# Altium PCB Board_Small_Unit_Altium.pcbdoc
Units mm, origin at the board's own origin, x right, y up, seen from the top; angles counter-clockwise.
Board outline 72.19 x 66.88 mm, 2 copper layers (Top Layer, Bottom Layer); 30 components, 28 nets, 89 pads, 12 vias.
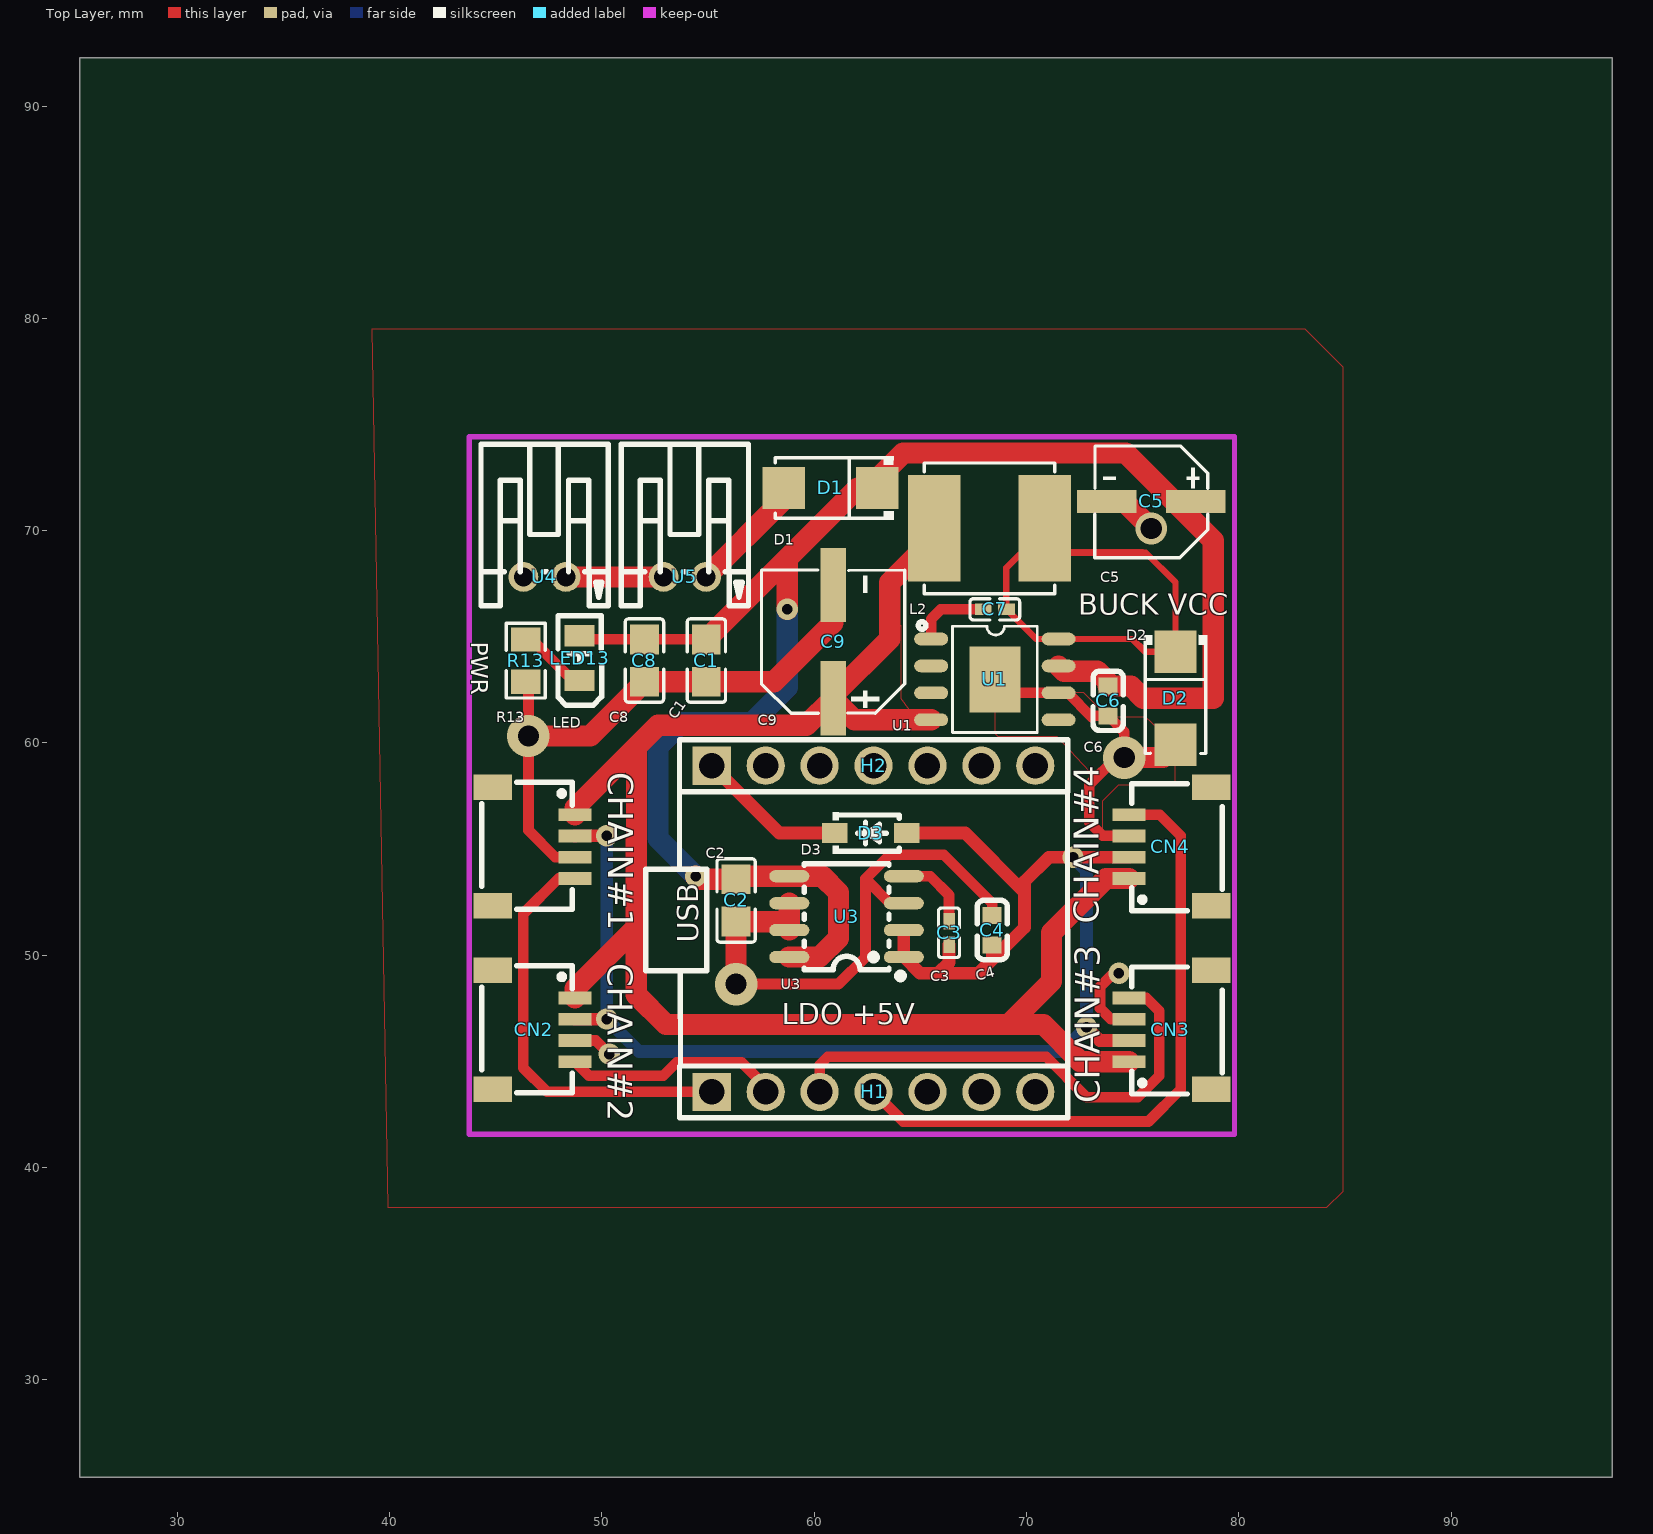
[diagram p0: Top Layer view]
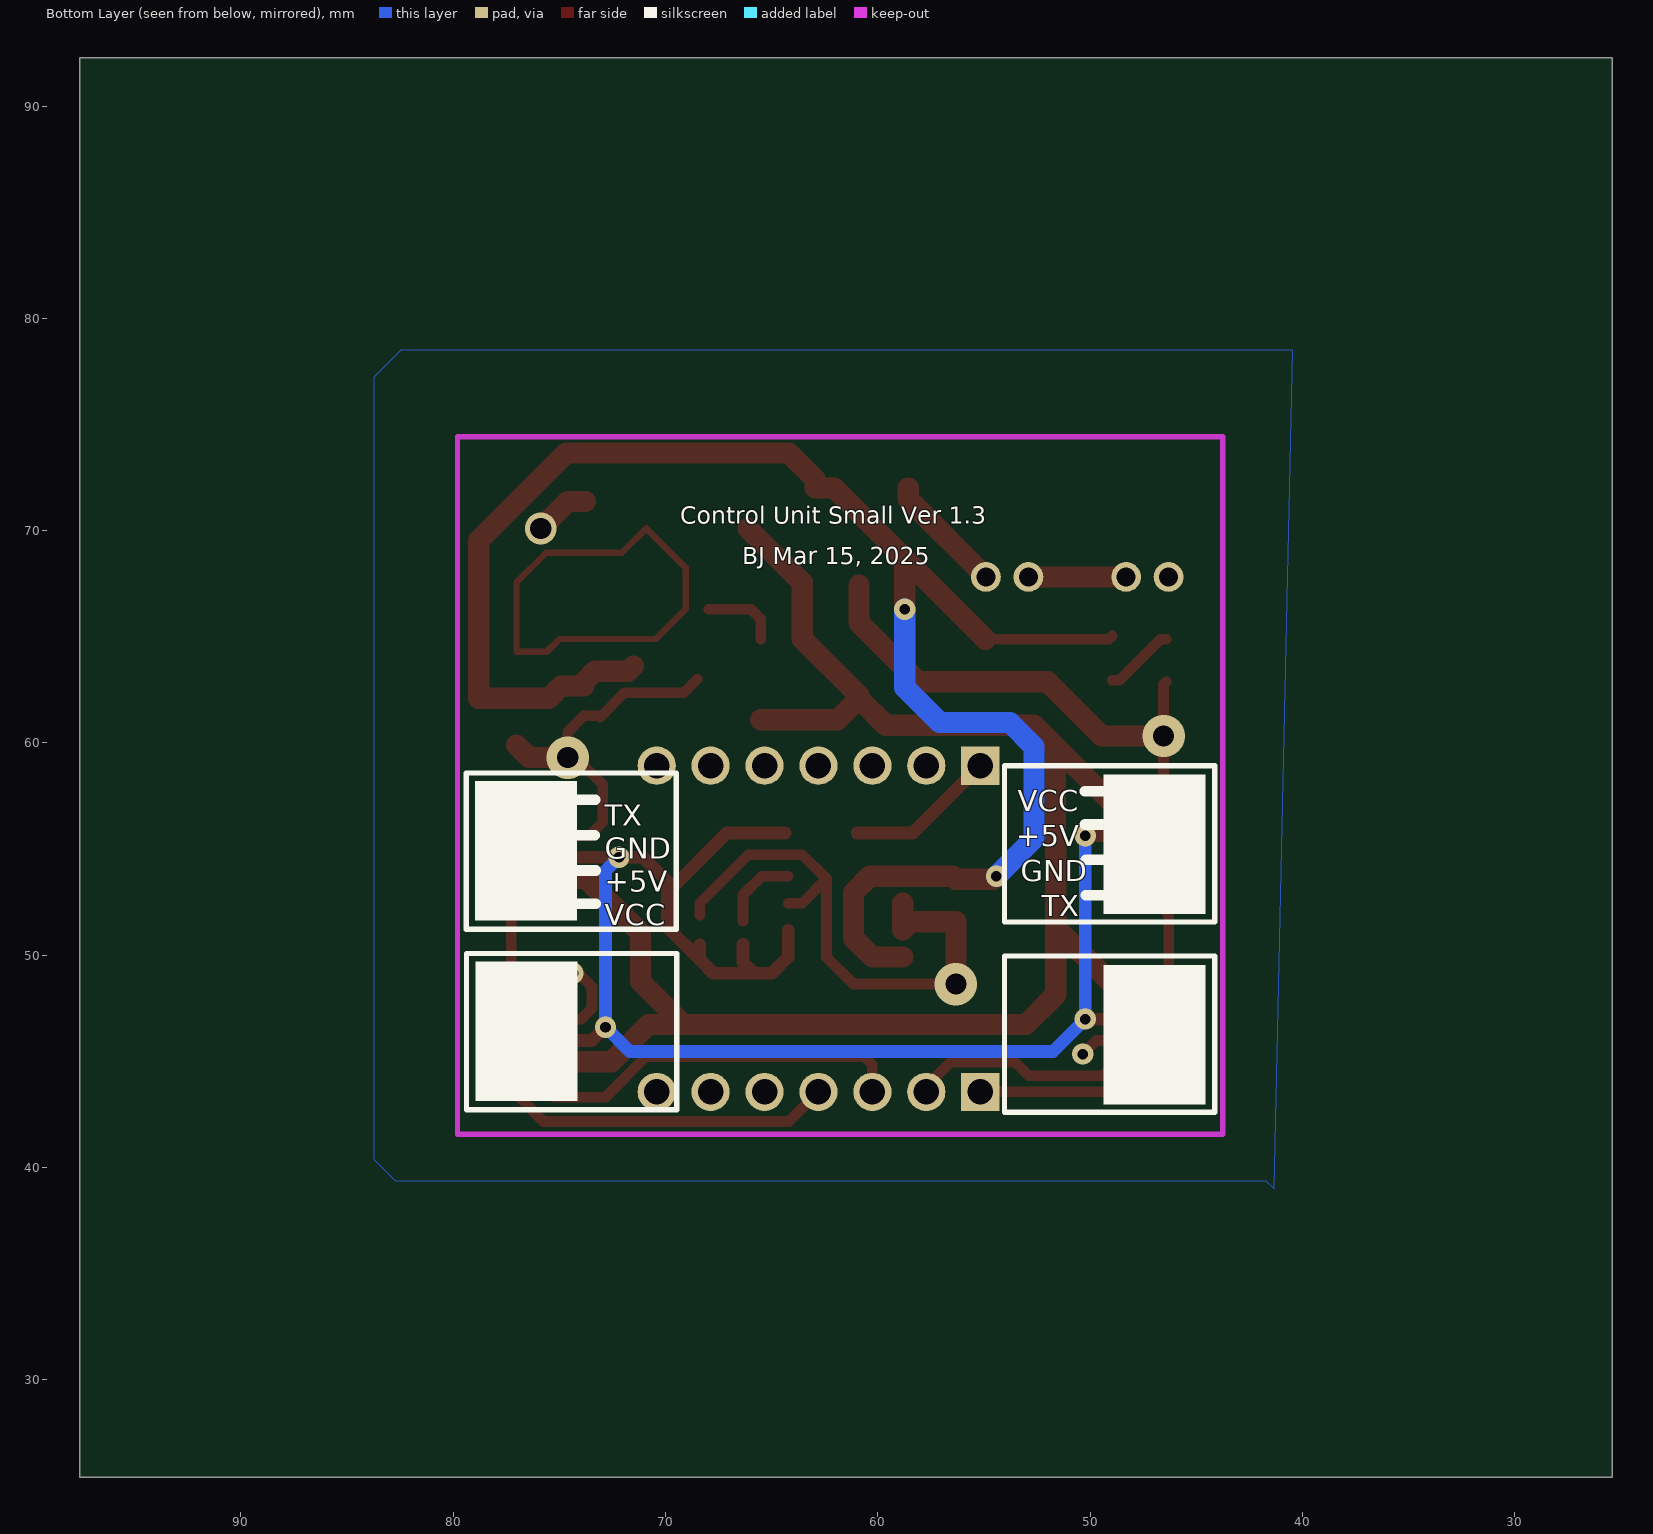
[diagram p1: Bottom Layer view, seen from below]

## Layer stack, top to bottom
Top Layer: signal copper (thickness not stored)
Dielectric: dielectric 0.32, FR-4, Dk 4.8
Bottom Layer: signal copper (thickness not stored)

## Board outline
97.591,25.4 25.4,25.4 25.4,92.276 97.591,92.276

## Components (designator, comment, footprint, x,y, rotation, side; value= is the part's Value field where it differs from the comment)
C1 "1uF" C0805 54.919,63.881 r90 top
C2 "1uF" C0805 56.316,52.578 r90 top
C3 "10nF" C0402 66.349,51.054 r270 top
C4 "10uF" C0603 68.381,51.181 r270 top
C5 "22uF" CAP-SMD_BD5.0-L5.3-W5.3-FD 75.874,71.374 r180 top
C6 "2.2uF" C0603 73.842,61.976 r270 top
C7 "10nF" C0402 68.508,66.294 r180 top
C8 "22uF" C0805 52.001,63.881 r90 top
C9 "120uF" CAP-SMD_BD6.3-L6.6-W6.6-FD 60.888,64.77 r90 top
CHAIN#1 "SM04B-SRSS-TB (LF)(SN)" CONN-SMD_4P-P1.00_SM04B-SRSS-TB-LF-SN 46.791,55.118 r270 top
CN2 "SM04B-SRSS-TB (LF)(SN)" CONN-SMD_4P-P1.00_SM04B-SRSS-TB-LF-SN 46.791,46.482 r270 top
CN3 "SM04B-SRSS-TB (LF)(SN)" CONN-SMD_4P-P1.00_SM04B-SRSS-TB-LF-SN 76.763,46.482 r90 top
CN4 "SM04B-SRSS-TB (LF)(SN)" CONN-SMD_4P-P1.00_SM04B-SRSS-TB-LF-SN 76.763,55.118 r90 top
D1 "SS34_C8678" SMA_L4.3-W2.6-LS5.2-RD 60.761,72.009 r180 top
D2 "SS34_C8678" SMA_L4.3-W2.6-LS5.2-RD 77.017,62.103 r270 top
D3 "B5819W_C8598" SOD-123_L2.7-W1.6-LS3.7-RD-1 62.666,55.753 r0 top
H1 "A2541HWV-7P" HDR-TH_7P-P2.54-V_A2541HWV-7P 62.793,43.561 r0 top
H2 "A2541HWV-7P" HDR-TH_7P-P2.54-V_A2541HWV-7P 62.793,58.928 r0 top
L2 "22uH" IND-SMD_L6.0-W6.0_SWPA6045S 68.254,70.104 r180 top
LED13 "SZYY0805YG" LED0805-R-RD_GREEN 48.945,63.997 r90 top
R13 "10kΩ" R0805 46.41,63.881 r90 top
U1 "LM22675MRX-5.0/NOPB" SO-8_L4.9-W3.9-P1.27-LS6.0-BL-EP5.1 68.508,62.992 r270 top
U3 "LT1763CS8-5#TRPBF" SO-8_L4.9-W3.9-P1.27-LS5.9-BL 61.523,51.816 r90 top
U4 "S2B-PH-K-S-GW" CONN-TH_S2B-PH-K-S-GW 47.299,67.818 r0 top
U5 "S2B-PH-K-S-GW" CONN-TH_S2B-PH-K-S-GW 53.903,67.818 r0 top
? "" ? 61.743,76.91 r0 top
? "" ? 40.949,58.039 r0 top
? "" ? 62.109,56.591 r0 top
? "" ? 50.859,51.071 r0 top
? "" ? 54.033,51.176 r0 top

## Footprints (in the part's own frame and the unit in brackets; to place one, negate y for a bottom-side part, rotate by r counter-clockwise, add the part's x,y. Pads: shape width x height; smd on the part's side, far side on the other; paste and mask are expansions set on the pad)
C0402 [mm]
  rect 0.79x0.54 smd paste-100 mask+0.051: 1(-0.545,0) 2(0.545,0)
  silkscreen extent -1.17,-0.5 1.17,0.5
C0603 [mm]
  rect 0.8x0.9 smd paste+0 mask+0.051: 1(-0.7,0) 2(0.7,0)
  silkscreen extent -1.41,-0.71 1.39,0.72
C0805 [mm]
  rect 1.41x1.35 smd paste-100 mask+0.051: 1(-1,0) 2(1,0)
  silkscreen extent -1.96,-0.9 1.96,0.9
CAP-SMD_BD5.0-L5.3-W5.3-FD [mm]
  rect 2.8x1.1 smd paste+0 mask+0.051: 1(-2.1,0) 2(2.1,0)
  silkscreen extent -2.66,-2.62 2.66,2.65
CAP-SMD_BD6.3-L6.6-W6.6-FD [mm]
  rect 3.5x1.2 smd paste+0 mask+0.051: 1(-2.67,0) 2(2.67,0)
  silkscreen extent -3.38,-3.38 3.38,3.38
CONN-SMD_4P-P1.00_SM04B-SRSS-TB-LF-SN [mm]
  rect 0.6x1.55 smd paste+0 mask+0.051: 1(-1.5,1.938) 2(-0.5,1.938) 3(0.501,1.938) 4(1.5,1.938)
  rect 1.2x1.8 smd paste+0 mask+0.051: 5(2.8,-1.938) 6(-2.8,-1.938)
  silkscreen extent -3.02,-2.46 2.96,1.8
CONN-TH_S2B-PH-K-S-GW [mm]
  round 1.4 hole 0.9 paste+0 mask+0.051: 1(1,0) 2(-1,0)
  silkscreen extent -3,-1.35 3,6.25
HDR-TH_7P-P2.54-V_A2541HWV-7P [mm]
  rect 1.8x1.8 hole 1.2 paste+0 mask+0.051: 1(-7.62,0)
  round 1.8 hole 1.2 paste+0 mask+0.051: 2(-5.08,0) 3(-2.54,0) 4(0,0) 5(2.54,0) 6(5.08,0) 7(7.62,0)
  silkscreen extent -9.14,-1.22 9.14,1.22
IND-SMD_L6.0-W6.0_SWPA6045S [mm]
  rect 2.474x5.02 smd paste+0 mask+0.051: 1(-2.603,0) 2(2.603,0)
  silkscreen extent -3.08,-3.08 3.08,3.08
LED0805-R-RD_GREEN [mm]
  rect 1x1.4 smd paste+0 mask+0.051: 1(1.05,0) 2(-1.05,0)
  silkscreen extent -2.22,-1.04 1.99,1.01
R0805 [mm]
  rect 1.133x1.377 smd paste-100 mask+0.051: 1(-1,0) 2(1,0)
  silkscreen extent -1.76,-0.92 1.76,0.92
SMA_L4.3-W2.6-LS5.2-RD [mm]
  rect 2x2 smd paste+0 mask+0.051: 1(-2.2,0) 2(2.2,0)
  silkscreen extent -2.98,-1.5 2.6,1.5
SO-8_L4.9-W3.9-P1.27-LS5.9-BL [mm]
  oval 0.574x1.888 smd paste+0 mask+0.051: 1(-1.905,-2.699) 2(-0.635,-2.699) 3(0.635,-2.699) 4(1.905,-2.699) 5(1.905,2.699) 6(0.635,2.699) 7(-0.635,2.699) 8(-1.905,2.699)
  silkscreen extent -2.94,-2.69 2.5,2
SO-8_L4.9-W3.9-P1.27-LS6.0-BL-EP5.1 [mm]
  oval 0.6x1.6 smd paste+0 mask+0.051: 1(-1.905,-3) 2(-0.635,-3) 3(0.635,-3) 4(1.905,-3) 5(1.905,3) 6(0.635,3) 7(-0.635,3) 8(-1.905,3)
  rect 3.1x2.4 smd paste+0 mask+0.051: 9(0,0)
  silkscreen extent -2.71,-3.6 2.5,2
SOD-123_L2.7-W1.6-LS3.7-RD-1 [mm]
  rect 1.2x0.95 smd paste+0 mask+0.051: 1(-1.7,0) 2(1.7,0)
  silkscreen extent -1.81,-0.98 1.35,0.98
? [mm]

## Via types
v1: diameter 1, hole 0.5, Top Layer to Bottom Layer, tented both sides, 8 vias
v2: diameter 2, hole 1, Top Layer to Bottom Layer, tented both sides, 3 vias
v3: diameter 1.5, hole 1, Top Layer to Bottom Layer, tented both sides, 1 vias

## Nets (pads, with @x,y where several pads share a name; then routed paths per layer and width w, separated by ;. In a path a pad name is that pad's centre, name@x,y a point inside that pad or via, vN(x,y) a via of type N, cw(c..) or ccw(c..) an arc to the next point about the centre after c; other vN are vias at no path point)
+5V: C3.2 C4.2 CHAIN#1.2 CN2.2 CN3.2 CN4.2 D3.2 U3.1 U3.2 | length 70.5
  Top Layer w0.6: CN2.2 v1(50.22,46.99) ; CHAIN#1.2 v1(50.22,55.626) ; U3.2 U3.1 64.984,49.149 65.841,49.149 ; D3.2 67.111,55.753 69.905,52.959 ; C3.2 66.349,49.657 65.841,49.149 ; C4.2 68.381,49.784 ; v1(72.826,46.609) 73.453,45.982 CN3.2 ; CN4.2 74.817,54.61 v1(72.191,54.61) 71.048,54.61 69.905,53.467 69.905,52.959 ; 65.841,49.149 67.746,49.149 68.381,49.784 ; 68.381,49.784 69.905,51.308 69.905,52.959
  Bottom Layer w0.6: v1(50.22,55.626) v1(50.22,46.99) 51.744,45.466 71.683,45.466 v1(72.826,46.609) 72.826,53.975 v1(72.191,54.61)
+7.4V: D1.2 U5.1 | length 5.7
  Top Layer w1: U5.1 58.561,71.476 D1.2
BAT: C1.2 C2.2 C5.1 C6.1 C8.2 D1.1 LED13.1 U1.7 U3.5 U3.8 | length 83.2
  Top Layer w0.5: LED13.1@48.944,65.047 49.11,64.881 C8.2 C1.2
  Top Layer w1: v1(54.411,53.721) 54.554,53.578 C2.2 56.459,53.721 U3.5 60.38,53.721 61.142,52.959 61.142,50.8 60.253,49.911 U3.8 ; C1.2 57.832,67.794 62.047,72.009 D1.1 62.961,72.431 64.19,73.66 74.672,73.66 77.974,70.358 78.795,69.537 78.795,62.103 75.493,62.103 74.92,62.676 C6.1 73.842,62.865 73.334,63.373 71.762,63.373 U1.7 ; v1(58.729,66.294) 58.729,68.691 58.776,68.738
  Bottom Layer w1: v1(54.411,53.721) 52.633,55.499 52.633,56.134 52.633,59.817 53.776,60.96 57.078,60.96 58.729,62.611 v1(58.729,66.294)
ESP_A0: CHAIN#1.4 H1.1 | length 19.7
  Top Layer w0.5: CHAIN#1.4@48.729,53.617 47.957,53.617 46.283,51.943 46.283,44.704 47.426,43.561 H1.1
ESP_A1: CN2.4 H1.2 | length 10.2
  Top Layer w0.5: CN2.4 49.387,44.323 52.887,44.323 53.522,44.958 56.57,44.958 57.713,43.815 H1.2
ESP_A2: CN3.4 H1.3 | length 23.4
  Top Layer w0.5: H1.3 60.253,44.831 60.634,45.212 70.921,45.212 72.826,43.307 75.239,43.307 76.255,44.323 76.255,47.371 75.643,47.983 CN3.4
ESP_A3: CN4.4 H1.4 | length 30.5
  Top Layer w0.5: H1.4 64.19,42.164 75.747,42.164 77.271,43.688 77.271,55.626 76.279,56.618 CN4.4
ESP_MI: H2.5
ESP_MO: H2.4
ESP_POWER: D3.1 H2.1 | length 7.1
  Top Layer w0.6: H2.1 58.348,55.753 D3.1
ESP_RX: H2.7
ESP_SCK: H2.6
ESP_SCL: H1.6
ESP_SDA: H1.5
ESP_TX: H1.7
GND: C1.1 C2.1 C4.1 C5.2 C6.2 C8.1 C9.2 CHAIN#1.3 CN2.3 CN3.3 CN4.3 D2.2 H2.2 R13.1 U1.6 U1.9 U3.3 U3.6 U3.7 U4.2 | length 80.9
  Top Layer w0.5: R13.1 46.537,62.754 v2(46.537,60.325) 46.537,55.88 47.799,54.618 CHAIN#1.3 ; CN2.3 49.704,45.982 v1(50.347,45.339) ; v2(56.316,48.641) 61.142,48.641 62.412,49.911 62.412,53.594 ; U3.3 63.555,52.451 62.412,53.594 ; C4.1 68.381,52.451 66.095,54.737 63.555,54.737 62.412,53.594 ; U1.9 69.143,62.357 U1.6 71.937,62.357 73.08,61.214 73.142,61.276 C6.2 74.604,60.514 v2(74.604,59.309) 74.223,59.309 72.953,58.039 72.953,56.261 73.596,55.618 CN4.3 ; v1(74.35,49.149) 74.096,49.149 73.461,48.514 73.461,47.752 73.461,47.498 73.977,46.982 CN3.3
  Top Layer w1: v2(46.537,60.325) 49.445,60.325 C8.1 C1.1 58.11,62.881 60.888,65.659 C9.2 ; v2(56.316,48.641) C2.1 58.427,51.578 U3.7 U3.6 ; C5.2 74.604,71.374 v3(75.874,70.104) ; v2(74.604,59.309) 76.423,59.309 D2.2
R13_2: LED13.2 R13.2 | length 3.3
  Top Layer w0.5: R13.2 46.679,64.882 48.615,62.946 LED13.2
S$1051: 
S$3274: 
S$11580: 
S$11590: 
S$11816: 
S$11829: 
SW: C7.1 D2.1 L2.1 U1.8 | length 23.8
  Top Layer w0.3: C7.1 69.053,68.249 70.908,70.104 72.051,68.961 75.62,68.961 77.017,67.564 D2.1 75.579,64.303 74.985,64.897 U1.8 70.45,64.897 C7.1
U1_1: C7.2 U1.1 | length 3.6
  Top Layer w0.5: U1.1 65.508,65.834 65.968,66.294 C7.2
U3_4: C3.1 U3.4 | length 3.7
  Top Layer w0.5: U3.4 65.46,53.721 66.349,52.832 C3.1
U4_1: U4.1 U5.2 | length 4.6
  Top Layer w1: U4.1 U5.2
VCC: C9.1 CHAIN#1.1 CN2.1 CN3.1 CN4.1 L2.2 U1.4 | length 80.8
  Top Layer w1: CN2.1@48.729,47.983 48.729,48.42 51.617,51.308 ; CHAIN#1.1 48.729,56.929 52.633,60.833 59.621,60.833 C9.1 ; 51.63,59.83 51.617,51.308 ; U1.4 61.901,61.087 C9.1 ; L2.2@66.108,70.104 63.555,67.551 63.555,64.897 60.888,62.23 C9.1 ; 68.725,46.736 69.143,46.736 71.175,48.768 71.175,51.054 73.738,53.617 CN4.1@74.825,53.617 ; CN3.1@74.825,44.981 72.547,44.981 70.794,46.736 53.014,46.736 51.617,48.133 51.617,51.308
pads on no net: CHAIN#1.5 CHAIN#1.6 CN2.5 CN2.6 CN3.5 CN3.6 CN4.5 CN4.6 H2.3 U1.2 U1.3 U1.5

## Polygon pours and split planes (outlines as drawn)
GND on Bottom Layer (solid): 40.441,78.486 82.478,78.486 83.748,77.216 83.748,40.386 82.732,39.37 41.711,39.37 41.33,38.989
VCC on Top Layer (solid): 64.063,65.278 64.063,62.103 64.444,61.595 64.444,61.087 61.904,61.087 61.777,61.087 60.761,62.103 60.761,62.23 64.063,65.532
SW on Top Layer (solid): 69.016,68.199 69.016,66.294 70.413,64.897 74.985,64.897 75.62,64.262 77.017,64.262 77.017,67.564 75.62,68.961 75.493,69.088 69.905,69.088 69.016,68.199
GND on Top Layer (solid): 73.588,55.626 73.588,57.277 74.223,57.912 74.35,58.039 77.017,58.039 77.017,59.944 75.62,61.214 73.842,61.214 72.699,62.357 71.556,62.357 71.429,62.484 68.508,62.484 68.508,60.452 68.635,60.325 71.429,60.325 72.953,58.674 72.953,58.547 72.953,56.261
VCC on Top Layer (solid): 39.171,79.502 83.113,79.502 84.891,77.724 84.891,38.862 84.129,38.1 39.933,38.1

## Silkscreen, mask and mechanical layers (free items; w line width, h text height)
Top Overlay:
  lines w0.254: 52.059,49.266 54.937,49.266 54.937,54.042 52.059,54.042 52.059,49.266
  lines w0.254 net S$11816: 53.651,54.078 53.651,57.707 ; 53.685,49.149 53.7,44.806
  lines w0.254 net S$11829: 71.929,57.694 71.937,44.767
  text "D1" at 58.094,69.346 h0.5
  text "C5" at 73.461,67.568 h0.5
  text "BUCK VCC" at 72.445,66.048 h1
  text "D2" at 74.697,64.825 h0.5
  text "PWR" at 43.851,64.77 h0.8 r270
  text "C1" at 53.473,61.071 h0.5 r55
  text "R13" at 45.013,60.964 h0.5
  text "C8" at 50.335,60.965 h0.5
  text "C9" at 57.332,60.837 h0.5
  text "LED" at 47.68,60.71 h0.5
  text "U1" at 63.682,60.583 h0.5
  text "C6" at 72.699,59.567 h0.5
  text "D3" at 59.364,54.741 h0.5
  text "C2" at 54.885,54.563 h0.5
  text "CHAIN#4" at 73.798,51.484 h2 r90
  text "USB" at 54.539,50.577 h1 r90
  text "CHAIN#2" at 49.873,49.63 h2 r270
  text "C3" at 65.46,48.772 h0.5
  text "C4" at 67.684,48.781 h0.5 r15
  text "U3" at 58.418,48.391 h0.5
  text "LDO +5V" at 58.475,46.744 h1
  text "CHAIN#3" at 73.847,43.03 h2 r90
Bottom Overlay:
  rectangle net S$11580: 44.552,51.936 49.36,58.504
  rectangle net S$11580: 74.159,51.642 78.967,58.209
  rectangle net S$11580: 44.552,42.97 49.36,49.538
  rectangle net S$11580: 74.139,43.139 78.947,49.707
  lines w0.254: 44.124,42.596 54.03,42.596 54.03,49.962 44.124,49.962 44.124,42.596 ; 44.124,51.562 54.03,51.562 54.03,58.928 44.124,58.928 44.124,51.562 ; 69.468,42.715 79.374,42.715 79.374,50.081 69.468,50.081 69.468,42.715 ; 69.488,51.217 79.394,51.217 79.394,58.583 69.488,58.583 69.488,51.217
  lines w0.5 net S$11590: 49.238,54.49 50.189,54.49 ; 49.258,52.819 50.209,52.819 50.209,52.819 ; 49.284,56.154 50.236,56.154 ; 49.286,57.73 50.237,57.73 50.237,57.73 ; 73.329,55.655 73.329,55.656 74.28,55.656 ; 74.232,52.416 73.281,52.416 ; 74.234,53.991 73.282,53.991 ; 74.26,57.327 73.309,57.327 ; 50.189,54.49 50.189,54.49 ; 50.236,56.154 50.236,56.154 ; 73.281,52.416 73.281,52.415 ; 73.282,53.991 73.282,53.991 ; 73.309,57.327 73.309,57.326
  text "Control Unit Small Ver 1.3" at 69.298,70.315 h0.8
  text "BJ Mar 15, 2025" at 66.377,68.41 h0.8
  text "VCC" at 53.395,56.777 h1
  text "TX" at 72.854,56.104 h1
  text "+5V" at 53.486,55.126 h1
  text "GND" at 72.854,54.542 h1
  text "GND" at 53.259,53.475 h1
  text "+5V" at 72.854,52.98 h1
  text "TX" at 52.277,51.824 h1
  text "VCC" at 72.854,51.418 h1
Document:
  lines w0.254 net S$3274: 53.268,60.198 73.08,60.198 73.08,42.164 53.268,42.164 53.268,60.198 ; 53.268,60.198 53.268,60.198